# Altium PCB Charge Amp PCB.PcbDoc
Units mm, origin at the board's own origin, x right, y up, seen from the top; angles counter-clockwise.
Board outline 74.6 x 32 mm, 2 copper layers (Top Layer, Bottom Layer), stack 1.569 mm thick; 21 components, 10 nets, 63 pads, 4 vias.
Unrouted connection lines stored in the file: 14.
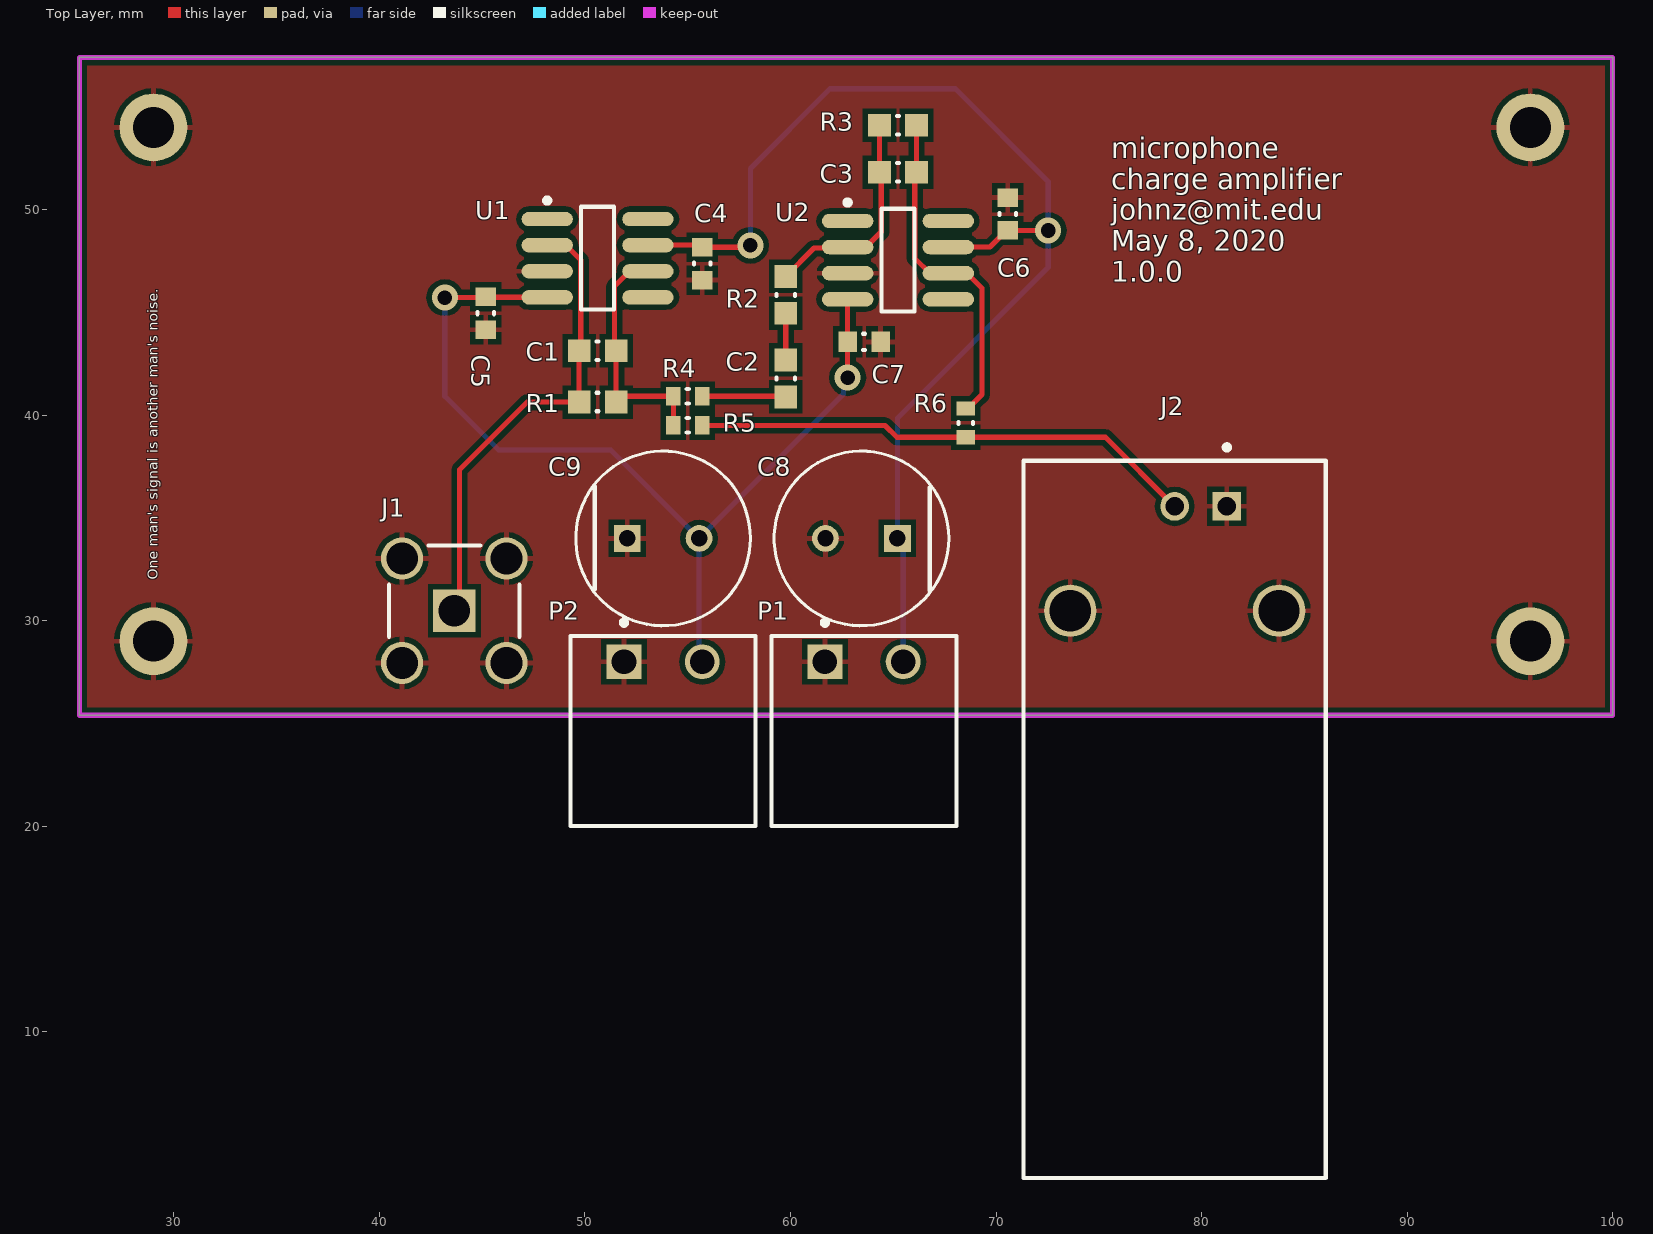
[diagram p0: Top Layer view]
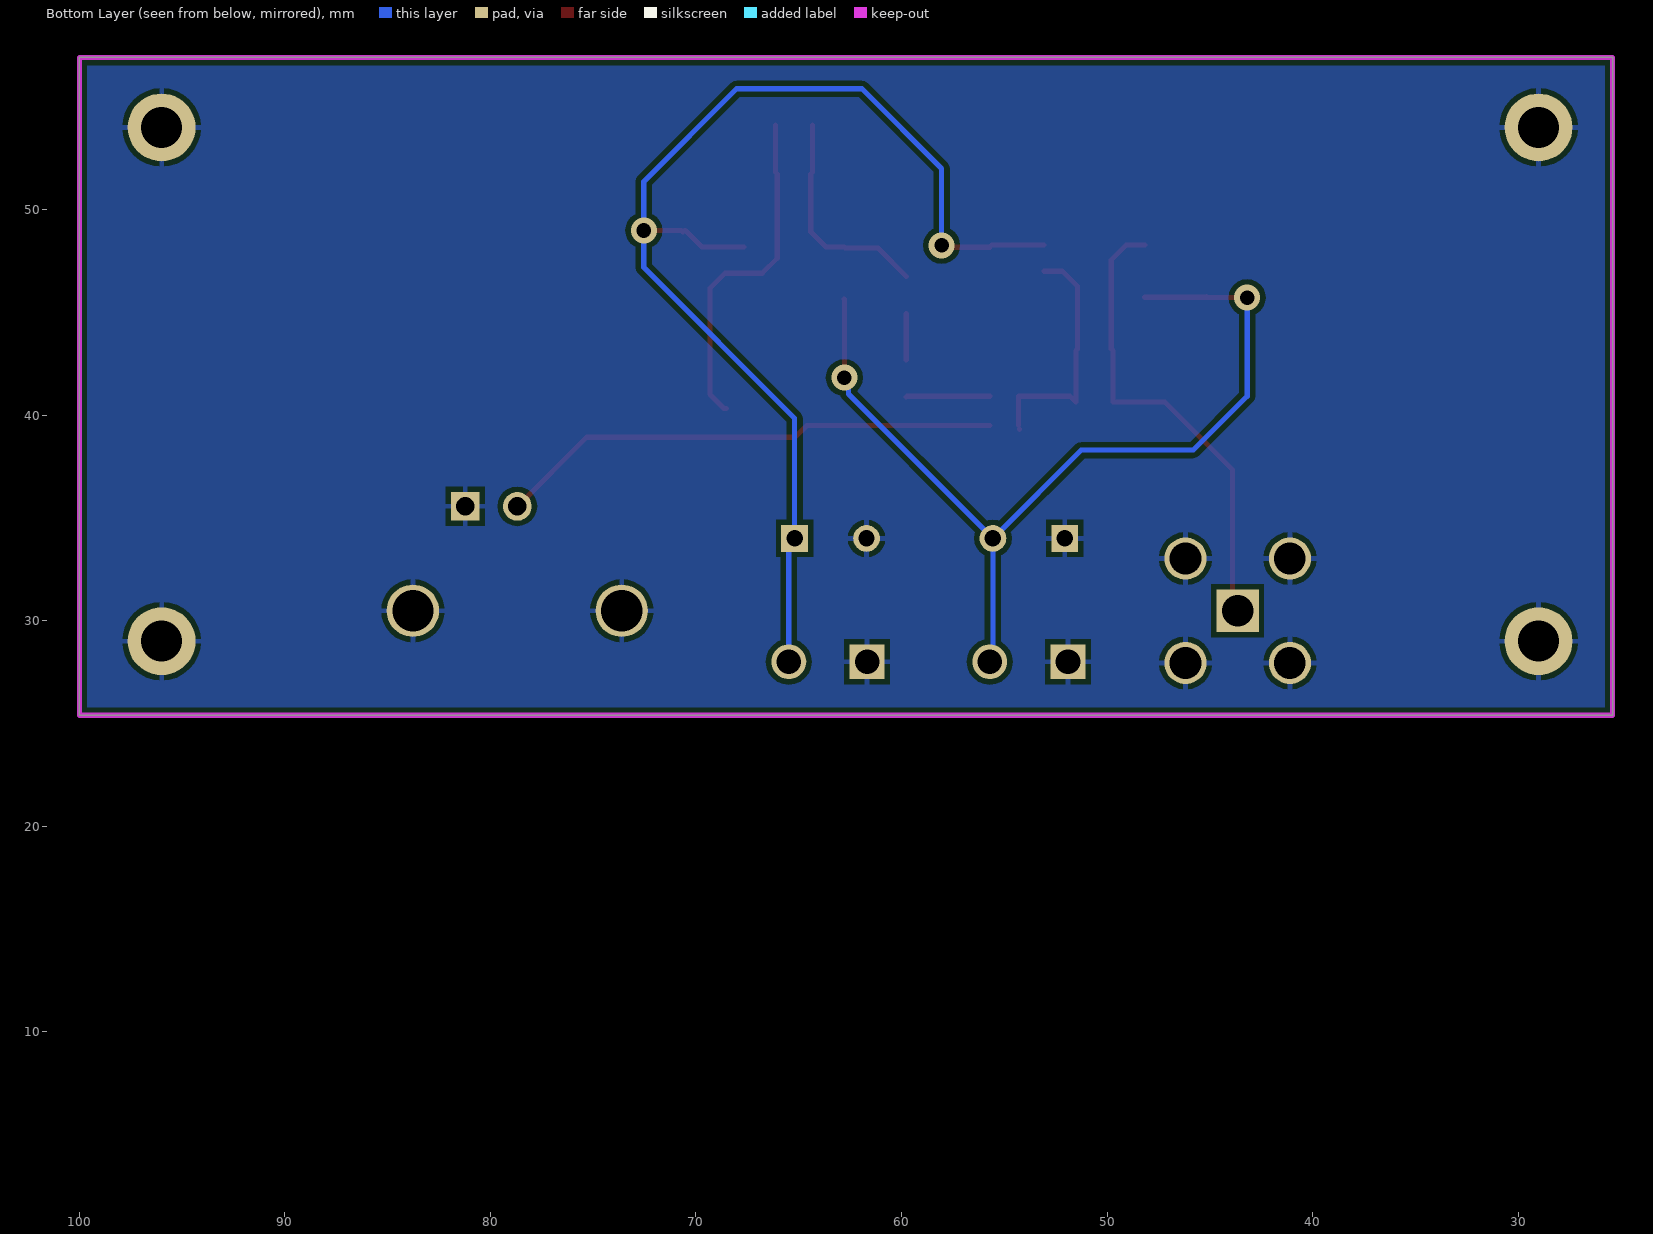
[diagram p1: Bottom Layer view, seen from below]

## Layer stack, top to bottom
Top Solder: solder mask 0.0254, SM-001, Dk 4
Top Layer: signal copper 0.035
Dielectric 1: core 1.4986, Core-043, Dk 4.3
Bottom Layer: signal copper 0.035
Bottom Solder: solder mask 0.0254, SM-001, Dk 4

## Board outline
25.4,25.4 100,25.4 100,57.404 25.4,57.404

## Design rules (kind name [scope] priority, off if disabled: settings)
Clearance [All] p1: gap=0.254 ignorepadtopadclearanceinfootprint=FALSE except(0: Arc-Hole Track-Hole SMDPad-Hole THPad-Hole Via-Hole Fill-Hole Poly-Hole Region-Hole Text-Hole)
MinimumSolderMaskSliver [All] p1: minsoldermaskwidth=0.127
PolygonConnect [All] p1: connectstyle=Relief reliefconductorwidth=0.254 reliefentries=4 polygonreliefangle="90 Angle" airgapwidth=0.254
RoutingVias [All] p1: holewidth=0.711 width=1.27 viastyle="Through Hole" minholewidth=0.711 minwidth=1.27 maxholewidth=0.711 maxwidth=1.27
SilkToSilkClearance [All] p1: silktosilkclearance=0.127
SilkToSolderMaskClearance [IsPad] p1: minsilkscreentomaskgap=0.15 clearancetoexposedcopper=TRUE
SolderMaskExpansion [All] p1: expansion=0.102
Width [All] p1: maxlimit=0.254 minlimit=0.254 preferedwidth=0.254
27 further rules are at their usual default settings.

## Components (designator, comment, footprint, x,y, rotation, side; value= is the part's Value field where it differs from the comment)
C1 "CAP 10nF 25V 0603(1608)" CAPC0603(1608)100_M 50.612,43.136 r0 top value=10nF
C2 "CAP 10nF 25V 0603(1608)" CAPC0603(1608)100_M 59.769,41.783 r90 top value=10nF
C3 "CAP 10nF 25V 0603(1608)" CAPC0603(1608)100_M 65.23,51.816 r180 top value=10nF
C4 "CAP 100nF 25V 0603(1608)" CAPC0603(1608)100_N 55.705,47.371 r90 top value=100nF
C5 "CAP 100nF 25V 0603(1608)" CAPC0603(1608)100_N 45.164,44.958 r270 top value=100nF
C6 "CAP 100nF 25V 0603(1608)" CAPC0603(1608)100_N 70.564,49.784 r90 top value=100nF
C7 "CAP 100nF 25V 0603(1608)" CAPC0603(1608)100_N 63.579,43.561 r180 top value=100nF
C8 "EEU-FC1V221L" FP-EEU-FC1V221L-MFG 63.452,34 r180 top value=220uF
C9 "EEU-FC1V221L" FP-EEU-FC1V221L-MFG 53.8,34 r0 top value=220uF
J1 "731000114" MOLX-731000114_V 43.64,30.48 r90 top
J2 "1-1337543-0" TECO-1-1337543-0_V 78.692,30.48 r180 top
P1 "1803277" PHOE-1803277_V 63.579,28 r0 top
P2 "1803277" PHOE-1803277_V 53.8,28 r0 top
R1 "2M 1% 0603(1608)" RESC0603(1608)_M 50.612,40.636 r0 top value="2000000.00 Ohm"
R2 "2M 1% 0603(1608)" RESC0603(1608)_M 59.769,45.847 r90 top value="2000000.00 Ohm"
R3 "2M" RESC0603(1608)_M 65.23,54.102 r0 top value="2000000.00 Ohm"
R4 "0 Ohm Jumper" RESC0603(1608)_L 55,40.92 r0 top value="10.00 Ohm"
R5 "0 Ohm Jumper" RESC0603(1608)_L 55,39.5 r180 top value="10.00 Ohm"
R6 "0 Ohm Jumper" RESC0603(1608)_L 68.532,39.624 r270 top value="10.00 Ohm"
U1 "LT1793AIS8" LT-S8-8_M 50.612,47.636 r0 top
U2 "LT1793AIS8" LT-S8-8_M 65.23,47.54 r0 top

## Footprints (in the part's own frame and the unit in brackets; to place one, negate y for a bottom-side part, rotate by r counter-clockwise, add the part's x,y. Pads: shape width x height; smd on the part's side, far side on the other; paste and mask are expansions set on the pad)
CAPC0603(1608)100_M [mm] "Chip Capacitor, Body 1.6x0.8mm, Height 1.0mm, IPC Low Density"
  rect 1.1x1.1 smd: 1(-0.9,0) 2(0.9,0)
  silkscreen extent -0.05,-0.45 0.05,0.45, body extent -0.87,-0.47 0.88,0.48, height 1
CAPC0603(1608)100_N [mm] "Chip Capacitor, Body 1.6x0.8mm, Height 1.0mm, IPC Medium Density"
  rect 0.9x1 smd: 1(-0.8,0) 2(0.8,0)
  silkscreen extent -0.05,-0.4 0.05,0.4, body extent -0.87,-0.48 0.88,0.47, height 1
FP-EEU-FC1V221L-MFG [mm]
  rect 1.3x1.3 hole 0.8 paste-1000 mask+0: 1(-1.75,0)
  round 1.3 hole 0.8 paste-1000 mask+0: 2(1.75,0)
  silkscreen extent -4.25,-4.25 4.25,4.25, body extent -4.35,-4.35 4.35,4.35, height 0.25
LT-S8-8_M [mm] "SOIC, 8-Leads, Body 4.9x3.9mm, Pitch 1.27mm, IPC Low Density"
  oval 2.5x0.7 smd: 1(-2.45,1.905) 2(-2.45,0.635) 3(-2.45,-0.635) 4(-2.45,-1.905) 5(2.45,-1.905) 6(2.45,-0.635) 7(2.45,0.635) 8(2.45,1.905)
  silkscreen extent -2.57,-2.5 0.8,2.93, body extent -2,-2.5 2,2.5, height 1.76
MOLX-731000114_V [mm] "Connector, 5-Leads, Body 14.8x6.35mm, Pitch 2.54mm"
  rect 2.05x2.05 hole 1.54: 1(0,0)
  round 2.05 hole 1.54: 2(-2.54,2.54) 3(-2.54,-2.54) 4(2.54,-2.54) 5(2.54,2.54)
  silkscreen extent -1.26,-3.17 3.17,3.17, body extent -11.62,-3.17 3.18,3.18, height 9.57
PHOE-1803277_V [mm] "CONN, Body 9.2x9.01mm, Pitch 3.81mm"
  rect 1.7x1.7 hole 1.2: 1(-1.905,0)
  round 1.7 hole 1.2: 2(1.905,0)
  silkscreen extent -4.5,-8 4.5,2.02, body extent -4.51,-8 4.5,1.3, height 7.25
RESC0603(1608)_L [mm] "Chip Resistor, Body 1.6x0.8mm, IPC High Density"
  rect 0.7x0.9 smd: 1(-0.7,0) 2(0.7,0)
  silkscreen extent -0.05,-0.35 0.05,0.35, body extent -0.85,-0.47 0.85,0.47, height 0.6
RESC0603(1608)_M [mm] "Chip Resistor, Body 1.6x0.8mm, IPC Low Density"
  rect 1.1x1.1 smd: 1(-0.9,0) 2(0.9,0)
  silkscreen extent -0.05,-0.45 0.05,0.45, body extent -0.85,-0.47 0.85,0.47, height 0.6
TECO-1-1337543-0_V [mm] "SMD, 2-Leads, Body 34.9x14.7mm, Pitch 2.54mm"
  rect 1.4x1.4 hole 0.89: 1(-2.54,-5.08)
  round 1.4 hole 0.89: 2(0,-5.08)
  round 2.55 hole 2.01: MH1(-5.08,0) MH2(5.08,0)
  silkscreen extent -7.35,-8.07 7.35,27.6, body extent -7.35,-7.1 7.35,28.05, height 15.8

## Part data
C1 C2 C3: library part CMP-1035-02316-1, "CAP 10nF 25V ±5% 0603 (1608 Metric) Thickness 1mm SMD", Case-EIA=0603, Case-Metric=1608, Rated Voltage="25 V", Tolerance=±5%, Max Thickness="1 mm", Technology=SMT
C4 C5 C6 C7: library part CMP-1035-02587-1, "CAP 100nF 25V ±5% 0603 (1608 Metric) Thickness 1mm SMD", Case-EIA=0603, Case-Metric=1608, Rated Voltage="25 V", Tolerance=±5%, Max Thickness="1 mm", Technology=SMT
C8 C9: library part CMP-05427-000010-1, "CAP ALUM 220UF 20% 35V RADIAL", Capacitance=220uF, Leakage Current=77uA, Manufacturer="Panasonic Electronic Components", Package=0, Ripple Current=730mA, Temperature="-55°C to +105°C", Temperature Range High=+105°C, Temperature Range Low=-55°C, Tolerance=20%, Voltage Rating=35V, Automotive=Yes, Automotive Grade="Grade 2", Category=Cap, ComponentLink2Description=Datasheet, ComponentLink2URL=https://industrial.panasonic.com/cdbs/www-data/pdf/RDF0000/ABA0000C1209.pdf, Device Class L1="Passive Components", Device Class L2=Capacitors, Device Class L3="Aluminum Electrolytic Capacitors", Digikey Description="CAP ALUM 220UF 20% 35V RADIAL", Dissipation Factor=12%, Esr=0.085O, Height=16.5mm, Lead Free=Yes, Life=2000Hours, Manufacturer Part Number=EEU-FC1V221L, Material=Aluminum, Mouser Description="Capacitor; Aluminum Electrolytic; Fc Radial Elec Cap 220uF 35V", Octopart=https://octopart.com/eeu-fc1v221l-panasonic-39478519, RoHS=TRUE
J1: library part CMP-2000-05487-1, "SMA Right-Angle PCB Jack Receptacle, Brass Body, Gold Plated, 50 Ohm, 5-Pin THD, RoHS, Tray", Manufacturer=Molex, Package Description="5-Pin Through Hole Device, Body 14.8 x 6.35 mm, Pitch 2.54 mm", Datasheet URL=http://www.molex.com/webdocs/datasheets/pdf/en-us/0731000114_RF_COAX_CONNECTORS.pdf, Datasheet Version=09/2016, Manufacturer URL=http://www.molex.com/, Mounting Technology=ThroughHole, Package Reference=731000114, Package URL=http://www.molex.com/pdm_docs/sd/731000114_sd.pdf
J2: library part CMP-2000-05853-1, "Female Connector, Pitch 2.54 mm, 1 x 2 Position, Height 15.8 mm, Tail Length 3.8 mm,  / -55 to 85 degC, RoHS, Bulk", Frequency Max=4GHz, Manufacturer="TE Connectivity", Package Description="Female Connector, Pitch 2.54 mm, 1 x 2 Position, Height 15.8 mm, Tail Length 3.8 mm", Coaxial Cable Types=-, Coaxial Termination=Solder, Connector Body Style=RightAngleJack, Connector Mounting=PCBMount, Connector Type=BNCCoaxial, Contact Material=Brass, Contact Plating=GoldPlatedContacts, Datasheet URL=http://www.te.com/commerce/DocumentDelivery/DDEController?Action=showdoc&DocId=Customer+Drawing%7F1337543%7FG%7Fpdf%7FEnglish%7FENG_CD_1337543_G.pdf%7F1-1337543-0, Datasheet Version="Rev. G, 12/2012", Impedance=50ohm, Manufacturer URL=http://www.te.com/, Mounting Technology=ThroughHole, Package Reference=1-1337543-0, Product Range=-, SVHC=ToBeAdvised
P1 P2: library part CMP-1765-00001-1, "Male Header, Pitch 3.81 mm, 1 x 2 Position, Height 7.25 mm, Tail Length 3.4 mm, RoHS, Bulk", Case\Package=1205, Case Code (Imperial)=1206, Case Code (Metric)=3216, Max Operating Temperature="125 degC", Min Operating Temperature="-55 degC", Package Quantity=1, Power Rating="248 mW", Resistance="10 kohm", Tolerance=5%, Voltage Rating="50 V", ComponentLink1Description="Manufacturer URL", ComponentLink1URL=http://www.phoenixcontact.com/, ComponentLink2Description=Datasheet, ComponentLink2URL=https://datasheet.ciiva.com/16096/1803277-16096845.pdf, ComponentLink3Description="Package Specification", ComponentLink3URL=https://www.phoenixcontact.com/online/portal/us/pxc/product_detail_page/!ut/p/b1/3ZfJkqM4EIafpR6AQmA2H9n3fTNcCLbCgDGrDfjpp6pmYg4T012XDh-MLkihiC__TGUqBcdwBKEIwNDDAScAfILja3qvq3Sp-2t6-ZrHROIxHs9bKIGYNs4AmcNZXsMcRDJQOIRPAEvchpoUjx1UTZ38Zl8Xbz54zDr6CpsNzjayIR3, DatasheetVersion=Feb-14, Elements=4, Height="0.024 inch", Length="0.126 inch", Mount="Surface Mount", PackageDescription="Male Header, Pitch 3.81 mm, 1 x 2 Position, Height 7.25 mm, Tail Length 3.4 mm", PackageReference=1803277, Packaging="Cut Tape", Pins=8, Radiation Hardening=No, REACH SVHC="No SVHC", RoHSCompliant=true, Width="0.063 inch"
R1 R2 R3: library part CMP-1012-00881-1, "2M 0.1W 1% 0603 (1608 Metric)  SMD", Case-EIA=0603, Case-Metric=1608, Power="0.1 W", Tolerance="1 %", Technology=SMT
R4: library part CMP-1012-00284-1, Case-EIA=0603, Case-Metric=1608, Power="0.1 W", Tolerance="1 %", Technology=SMT
R5 R6: library part CMP-1012-00284-1, "10R 0.1W 1% 0603 (1608 Metric)  SMD", Case-EIA=0603, Case-Metric=1608, Power="0.1 W", Tolerance="1 %", Technology=SMT
U1 U2: library part CMP-0359-03672-2, "Single Channel, Low Distortion, Low Noise, Precision Operational Amplifier, Picoampere Bias Current, 4.2 MHz Typical GBW, 3.4 V/us Typical SR, 10 to 40 V, 8-Pin SOIC (S8-8), Industrial", Linear Technology Part Number=LT1793, Manufacturer="Linear Technology", Channels (#)=1, ComponentLink1Description="Manufacturer URL", ComponentLink1URL=http://www.linear.com/, ComponentLink2Description=Datasheet, ComponentLink2URL=http://cds.linear.com/docs/en/datasheet/1793f.pdf, ComponentLink3Description="Package Specification", ComponentLink3URL=http://cds.linear.com/docs/en/packaging/05081610_G_SO8.pdf, GBW (MHz) Typical=4.2, Is (mA) Typical=4.2, Mounting Technology="Surface Mount", PackageDescription="8-Pin Plastic Small Outline, Body 4.9 x 3.9 mm, Pitch 1.27 mm", PackageReference=LT-S8-8, PackageVersion="Rev G", PartNumber=LT1793AIS8, RevisionNote="URLs updated", SR (V/us) Typical=3.4, Type=JFET, Vos (mV) Guaranteed=0.8, Vos (mV) Typical=0.25, Vs Max (V)=40, Vs Min (V)=10

## Free pads (board coordinates)
  round 3.3 hole 2: 2(96,29) 3(29,29) 4(29,54) 5(96,54)

## Via types
v1: diameter 1.27, hole 0.711, Top Layer to Bottom Layer, 4 vias

## Nets (pads, with @x,y where several pads share a name; then routed paths per layer and width w, separated by ;. In a path a pad name is that pad's centre, name@x,y a point inside that pad or via, vN(x,y) a via of type N, cw(c..) or ccw(c..) an arc to the next point about the centre after c; other vN are vias at no path point)
+9V: C4.2 C6.1 C8.1 P1.2 U1.7 U2.7 | length 58.5
  Top Layer w0.254: U1.7 55.605,48.271 C4.2 57.961,48.171 v1(58.05,48.26) ; U2.7 69.705,48.175 70.514,48.984 C6.1 70.642,48.906 70.72,48.984 v1(72.536,48.984)
  Bottom Layer w0.254: v1(58.05,48.26) 58.05,52.002 61.928,55.88 68.024,55.88 72.536,51.368 v1(72.536,48.984) 72.536,47.184 65.202,39.85 C8.1 65.484,33.718 P1.2
-9V: C5.1 C7.2 C9.2 P2.2 U1.4 U2.4 | length 45.8
  Top Layer w0.254: v1(43.18,45.72) 45.126,45.72 C5.1 45.191,45.731 U1.4 ; v1(62.779,41.821) C7.2 62.779,45.634 U2.4
  Bottom Layer w0.254: v1(43.18,45.72) 43.18,40.92 45.8,38.3 51.25,38.3 55.4,34.15 55.4,34 C9.2 ; P2.2 55.55,28.155 C9.2 ; v1(62.779,41.821) 62.585,41.627 62.585,41.035 C9.2
GND: C4.1 C5.2 C6.2 C7.1 C8.2 C9.1 J1.2 J1.3 J1.4 J1.5 J2.1 J2.MH1 J2.MH2 P1.1 P2.1 pad.2 pad.3 pad.4 pad.5 U1.3 U2.3
NetC2_2: C2.2 R2.1 | length 2.3
  Top Layer w0.254: C2.2 R2.1
NetC3_2: C3.2 R2.2 R3.1 U2.2 | length 10.8
  Top Layer w0.254: R2.2 61.149,48.127 62.732,48.127 U2.2 63.68,48.175 64.411,48.906 64.411,51.735 C3.2 R3.1
NetJ2_2: J2.2 R5.1 R6.2 | length 24.6
  Top Layer w0.254: R5.1 64.6,39.5 65.176,38.924 R6.2 75.328,38.924 J2.2
v1: C1.2 R1.2 R4.1 R5.2 U1.6 | length 11.9
  Top Layer w0.254: U1.6 52.162,47.001 51.431,46.27 51.431,43.217 C1.2 R1.2 51.796,40.92 R4.1 R5.2
v2: C3.1 R3.2 R6.1 U2.6 | length 16.6
  Top Layer w0.254: R3.2 C3.1 66.049,51.735 66.049,47.636 66.78,46.905 U2.6 68.58,46.905 69.311,46.174 69.311,41.003 68.632,40.324 R6.1
v3: C2.1 R4.2 | length 4.1
  Top Layer w0.254: R4.2 59.732,40.92 C2.1
vin: C1.1 J1.1 R1.1 U1.2 | length 23
  Top Layer w0.254: J1.1 43.894,30.734 43.894,37.338 47.192,40.636 R1.1 C1.1 49.793,43.217 49.793,47.54 49.062,48.271 U1.2
pads on no net: U1.1 U1.5 U1.8 U2.1 U2.5 U2.8

## Polygon pours and split planes (outlines as drawn)
GND on Bottom Layer (solid, pour order 30): 25.4,57.4 25.4,25.4 100,25.4 100,57.4
GND on Top Layer (solid, pour order 28): 25.4,57.404 100,57.404 100,25.4 25.4,25.4

## Keep-outs
Top Layer:
  lines w0.254: 25.4,57.404 100,57.404
Keep-Out Layer:
  the board outline again, w0.254

## Silkscreen, mask and mechanical layers (free items; w line width, h text height)
Top Overlay:
  text "microphone / charge amplifier / johnz@mit.edu / May 8, 2020 / 1.0.0" at 75.6,46.5 h1
  text "One man's signal is another man's noise." at 29.2,32 h0.5 r90